# Altium PCB fullsat(1).PcbDoc
Units mm, origin at the board's own origin, x right, y up, seen from the top; angles counter-clockwise.
Board outline 82 x 325.9 mm, 4 copper layers (F.Cu, In1.Cu, In2.Cu, B.Cu); 26 components, 0 nets, 102 pads, 11 vias.
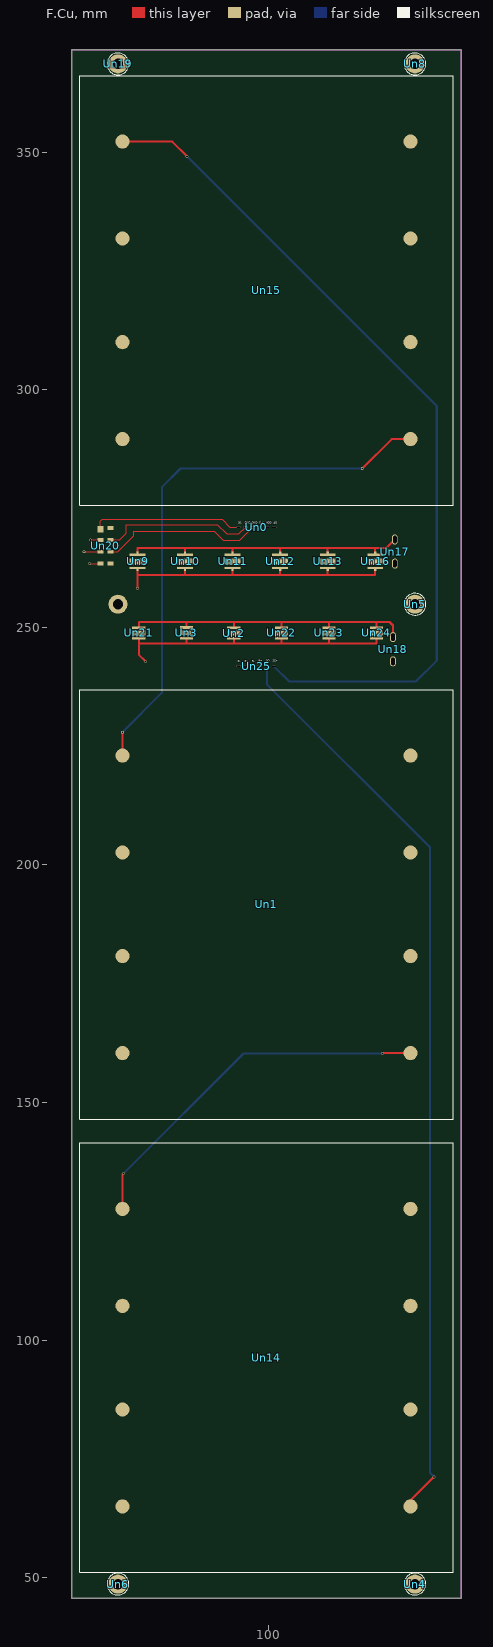
[diagram p0: F.Cu view]
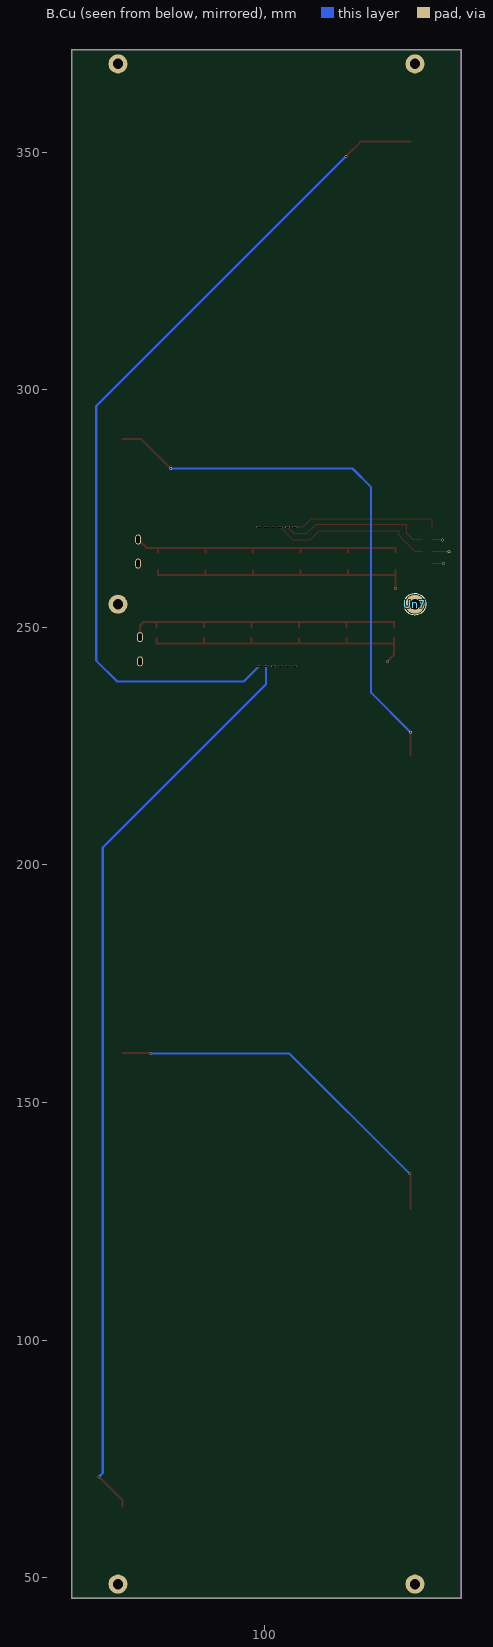
[diagram p1: B.Cu view, seen from below]
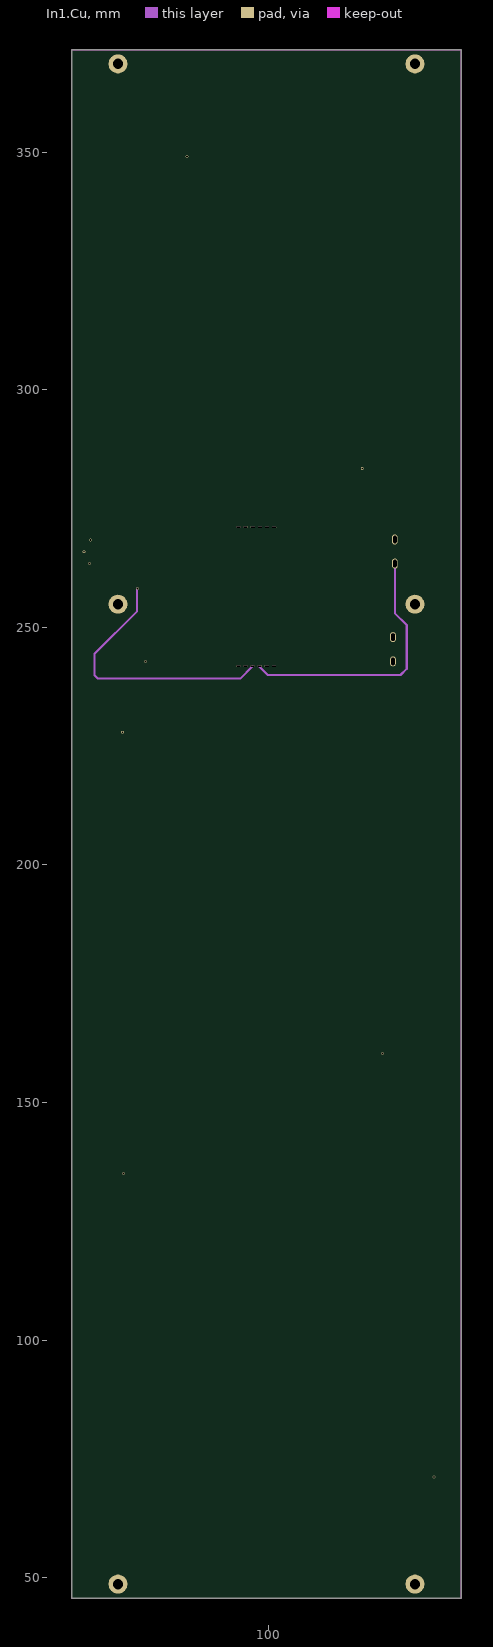
[diagram p2: In1.Cu]
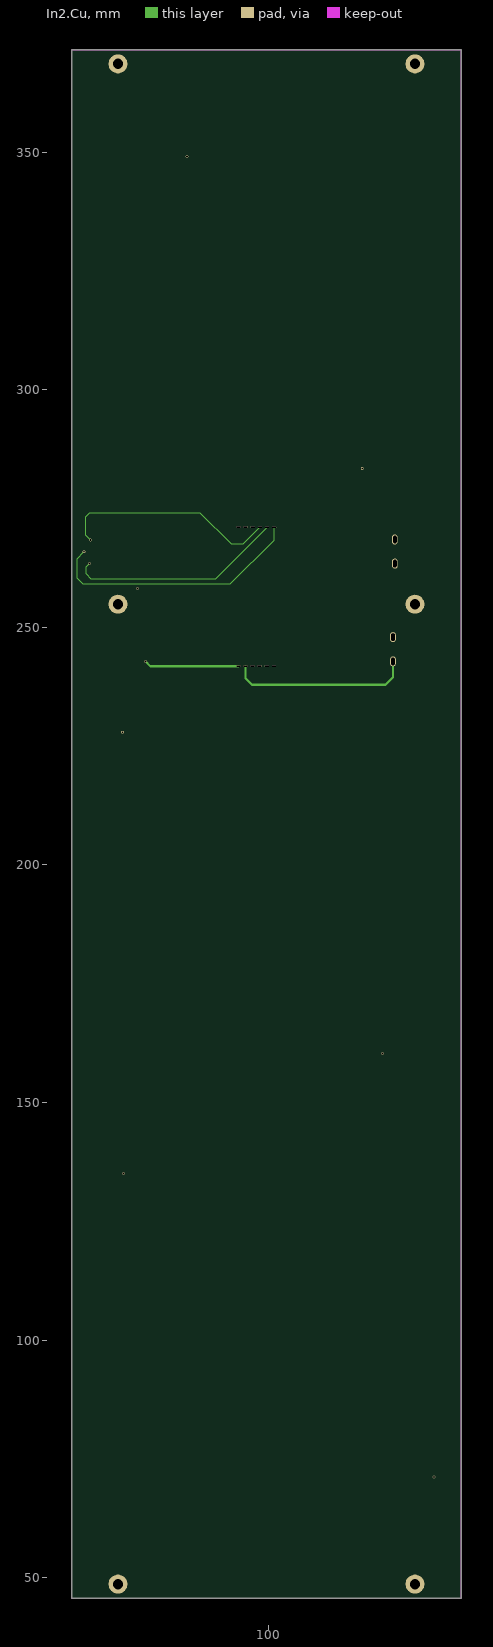
[diagram p3: In2.Cu]

## Layer stack, top to bottom
F.Mask: solder mask 0.0102, Solder Resist, Dk 3.5
F.Cu: signal copper 0.0356
Dielectric 1: dielectric 0.32, FR-4, Dk 4.8
In1.Cu: signal copper 0.0356
Dielectric2: dielectric 0.32, FR-4, Dk 4.8
In2.Cu: signal copper 0.0356
Dielectric3: dielectric 0.32, FR-4, Dk 4.8
B.Cu: signal copper 0.0356
B.Mask: solder mask 0.0102, Solder Resist, Dk 3.5

## Board outline
140.54,371.55 140.54,45.65 58.54,45.65 58.54,371.55 140.54,371.55

## Design rules (kind name [scope] priority, off if disabled: settings)
Clearance "Clearence 0.2_NetClass" [InNetClass('Default')] p1: gap=0.2 ignorepadtopadclearanceinfootprint=FALSE
HoleSize "Hole Size (Default)" [All] p1: absolutevalues=TRUE maxlimit=10 minlimit=0.3 maxpercent=80.000 minpercent=20.000
MinimumSolderMaskSliver [All] p1: minsoldermaskwidth=0
PolygonConnect [All] p1: connectstyle=Direct reliefconductorwidth=0.254 reliefentries=4 polygonreliefangle="90 Angle" airgapwidth=0.254
RoutingVias [All] p1: holewidth=0.711 width=1.27 viastyle="Through Hole" minholewidth=0.711 minwidth=1.27 maxholewidth=0.711 maxwidth=1.27
SilkToSilkClearance [All] p1: silktosilkclearance=0
SilkToSolderMaskClearance [IsPad] p1: minsilkscreentomaskgap=0 clearancetoexposedcopper=TRUE
SolderMaskExpansion [All] p1: expansion=0.102 istentingtop=FALSE
Width [All] p1: maxlimit=10 minlimit=0.2 preferedwidth=0.25 minimp=50.000000 maximp=50.000000 favimp=50.000000
26 further rules are at their usual default settings.

## Components (designator, comment, footprint, x,y, rotation, side; value= is the part's Value field where it differs from the comment)
Un0 "Comment" connector 97.42,271.05 r0 top
Un1 "Comment" solarpanels#1 64.74,160.4 r90 top
Un2 "Comment" greenLED 92.68,248.79 r90 top
Un3 "Comment" greenLED 82.7,248.82 r90 top
Un4 "Comment" 1pin 130.79,48.65 r0 top
Un5 "Comment" 1pin 130.79,254.85 r0 top
Un6 "Comment" 1pin 68.29,48.65 r0 top
Un7 "Comment" 1pin 68.29,254.85 r180 bottom
Un8 "Comment" 1pin 130.79,368.55 r0 top
Un9 "Comment" redLED 69,263.86 r90 top
Un10 "Comment" redLED 79,263.86 r90 top
Un11 "Comment" redLED 89,263.86 r90 top
Un12 "Comment" redLED 99,263.86 r90 top
Un13 "Comment" redLED 109,263.86 r90 top
Un14 "Comment" solarpanels#2 64.84,65 r90 top
Un15 "Comment" solarpanels#2 64.84,289.6 r90 top
Un16 "Comment" redLED 119,263.86 r90 top
Un17 "Comment" resistor#1 124.19,263.39 r90 top
Un18 "Comment" resistor#2 123.91,242.83 r90 top
Un19 "Comment" 1pin 68.29,368.55 r0 top
Un20 "Comment" sunsensor 63.96,271.29 r0 top
Un21 "Comment" greenLED 72.68,248.81 r90 top
Un22 "Comment" greenLED 102.7,248.8 r90 top
Un23 "Comment" greenLED 112.69,248.8 r90 top
Un24 "Comment" greenLED 122.69,248.8 r90 top
Un25 "Comment" connector 97.37,241.8 r0 top

## Footprints (in the part's own frame and the unit in brackets; to place one, negate y for a bottom-side part, rotate by r counter-clockwise, add the part's x,y. Pads: shape width x height; smd on the part's side, far side on the other; paste and mask are expansions set on the pad)
1pin [mm]
  round 4 hole 2.2 paste-2539.97 mask+0.2: 1(0,0)
  silkscreen extent -2.28,-2.29 2.29,2.29
connector [mm]
  rrect100% 0.9x0.4 hole 0.25 slot 0.75 at 0 deg paste-2539.97 mask+0.2: 1(-3.75,0) 21(-2.253,0) 31(-0.756,0) 41(0.741,0) 51(2.238,0) 61(3.735,0)
greenLED [mm]
  rect 1x2.8 smd mask+0.2: 1(0,0)
  rect 0.55x2.8 smd mask+0.2: 2(-1.125,0) 3(1.125,0)
redLED [mm]
  rect 1.3x3.3 smd mask+0.2: 1(0,-3.4)
  rect 0.5x3.3 smd mask+0.2: 2(-1.4,-3.4) 3(1.4,-3.4)
  rect 0.4x0.5 smd mask+0.2: 4(1.85,-3.4) 5(-1.85,-3.4)
resistor#1 [mm]
  rrect100% 2.1x1.2 hole 0.7 slot 1.6 at 0 deg paste-2539.97 mask+0.2: 1(0,-2.37) 1(5.08,-2.37)
resistor#2 [mm]
  rrect100% 2.1x1.2 hole 0.7 slot 1.6 at 0 deg paste-2539.97 mask+0.2: 1(0,-2.25) 1(5.08,-2.25)
solarpanels#1 [mm]
  round 3 smd mask+0.2: 1(0,-4.5) 1(0,-65.1) 1(20.4,-4.5) 1(20.4,-65.1) 1(42.2,-4.5) 1(42.2,-65.1) 1(62.6,-65.1) 1(62.6,-4.5)
solarpanels#2 [mm]
  round 3 smd mask+0.2: 1(0,-4.4) 1(0,-65) 1(20.4,-4.4) 1(20.4,-65) 1(42.2,-4.4) 1(42.2,-65) 1(62.6,-65) 1(62.6,-4.4)
sunsensor [mm]
  rect 1.3x1.4 smd mask+0.2: 1(0.65,-0.7)
  rect 1.3x0.8 smd mask+0.2: 2(0.65,-7.9) 2(0.65,-5.4) 2(0.65,-2.9) 2(2.75,-7.9) 2(2.75,-5.4) 2(2.75,-2.9) 2(2.75,-0.4)

## Part data
Un0 Un25: library part connector
Un1 Un14 Un15: library part solarpanels
Un2 Un3 Un21 Un22 Un23 Un24: library part greenLED
Un4 Un5 Un6 Un7 Un8 Un19: library part 1pin, "module 1 pin (ou trou mecanique de percage)"
Un9 Un10 Un11 Un12 Un13 Un16: library part redLED
Un17 Un18: library part resistor
Un20: library part sunsensor

## Via types
v1: diameter 0.6, hole 0.4, F.Cu to B.Cu, tented both sides, 11 vias

## Nets (pads, with @x,y where several pads share a name; then routed paths per layer and width w, separated by ;. In a path a pad name is that pad's centre, name@x,y a point inside that pad or via, vN(x,y) a via of type N, cw(c..) or ccw(c..) an arc to the next point about the centre after c; other vN are vias at no path point)
pads on no net: Un0.1 Un0.21 Un0.31 Un0.41 Un0.51 Un0.61 Un1.1 Un2.1 Un2.2 Un2.3 Un3.1 Un3.2 Un3.3 Un4.1 Un5.1 Un6.1 Un7.1 Un8.1 Un9.1 Un9.2 Un9.3 Un9.4 Un9.5 Un10.1 Un10.2 Un10.3 Un10.4 Un10.5 Un11.1 Un11.2 Un11.3 Un11.4 Un11.5 Un12.1 Un12.2 Un12.3 Un12.4 Un12.5 Un13.1 Un13.2 Un13.3 Un13.4 Un13.5 Un14.1 Un15.1 Un16.1 Un16.2 Un16.3 Un16.4 Un16.5 Un17.1 Un18.1 Un19.1 Un20.1 Un20.2 Un21.1 Un21.2 Un21.3 Un22.1 Un22.2 Un22.3 Un23.1 Un23.2 Un23.3 Un24.1 Un24.2 Un24.3 Un25.1 Un25.21 Un25.31 Un25.41 Un25.51 Un25.61
copper on no net: | length 1235.5
  F.Cu w0.25: v1(61.13,265.89) 61.12,265.89 64.61,265.89 ; v1(62.28,263.39) 64.61,263.39 ; v1(62.5,268.39) 64.61,268.39 ; 64.61,270.59 64.61,272.26 65.03,272.68 90.23,272.68 91.86,271.05 93.67,271.05 ; 66.71,265.89 68.24,265.89 71.62,269.27 71.62,270.17 71.65,270.2 88.54,270.2 90.47,268.27 93.884,268.27 96.664,271.05 ; 66.71,268.39 68.67,268.39 70.05,269.77 70.05,271.57 70.06,271.58 89.2,271.58 91.15,269.63 93.747,269.63 95.167,271.05
  F.Cu w0.45: 69.24,127.6 69.24,134.84 v1(69.42,135.02) ; 69.24,223 v1(69.24,227.91) ; 69.24,352.2 79.72,352.2 v1(82.84,349.08) ; v1(72.39,258.16) 72.4,258.17 72.4,261.01 ; 72.4,262.01 72.4,261.01 ; 72.4,265.71 72.4,266.71 82.4,266.71 ; 72.68,247.685 72.68,246.6 72.69,246.6 ; 72.68,249.935 72.68,251.1 72.72,251.1 82.7,251.1 ; v1(74.1,242.81) 72.69,244.22 72.69,246.6 ; 82.4,262.01 82.4,261.01 ; 82.4,265.71 82.4,266.71 ; 82.7,247.695 82.7,246.6 ; 82.7,249.945 82.7,251.1 ; 92.4,262.01 92.4,261.01 ; 92.4,265.71 92.4,266.71 ; 92.68,247.665 92.68,246.6 ; 92.68,249.915 92.68,251.1 ; 102.4,262.01 102.4,261.01 ; 102.4,265.71 102.4,266.71 ; 102.7,247.675 102.7,246.6 ; 102.7,249.925 102.7,251.1 ; 112.4,262.01 112.4,261.01 ; 112.4,265.71 112.4,266.71 ; 112.69,247.675 112.69,246.6 ; 112.69,249.925 112.69,251.1 ; v1(119.69,283.41) 125.88,289.6 129.84,289.6 ; 122.4,262.01 122.4,261.01 112.4,261.01 ; 122.4,265.71 122.4,266.71 ; 122.69,247.675 122.69,246.6 122.63,246.6 112.69,246.6 ; 122.69,249.925 122.69,251.1 122.68,251.1 ; v1(123.93,160.32) 124.01,160.4 129.84,160.4 ; 126.16,247.91 126.16,250.38 125.44,251.1 122.68,251.1 ; 126.56,268.47 124.8,266.71 122.4,266.71 ; 129.84,65 129.84,66.26 v1(134.8,71.22) ; 72.4,261.01 82.4,261.01 ; 72.69,246.6 78.98,246.6 82.7,246.6 ; 82.4,261.01 92.4,261.01 ; 82.4,266.71 92.4,266.71 ; 82.7,246.6 92.68,246.6 ; 82.7,251.1 92.68,251.1 ; 92.4,261.01 102.4,261.01 ; 92.4,266.71 102.4,266.71 ; 92.68,246.6 102.7,246.6 ; 92.68,251.1 102.7,251.1 ; 102.4,261.01 112.4,261.01 ; 102.4,266.71 112.4,266.71 ; 102.7,246.6 112.69,246.6 ; 102.7,251.1 112.69,251.1 ; 112.4,266.71 122.4,266.71 ; 112.69,251.1 122.68,251.1
  In1.Cu w0.45: v1(72.39,258.16) 72.33,258.1 72.33,253.39 63.36,244.42 63.36,239.9 64.08,239.18 93.994,239.18 96.614,241.8 ; 98.04,241.75 98.58,241.21 ; 98.111,241.679 98.58,241.21 ; 126.56,263.39 126.56,252.98 129.07,250.47 129.07,241.27 127.75,239.95 99.84,239.95 98.58,241.21
  In2.Cu w0.25: v1(61.13,265.89) 59.69,264.45 59.69,260.32 60.89,259.12 91.93,259.12 101.155,268.345 101.155,271.05 ; v1(62.28,263.39) 61.61,262.72 61.61,261.25 62.61,260.25 88.858,260.25 99.658,271.05 ; v1(62.5,268.39) 61.56,269.33 61.56,273.29 62.36,274.09 85.53,274.09 92.09,267.53 94.641,267.53 98.161,271.05
  In2.Cu w0.45: v1(74.1,242.81) 75.11,241.8 93.62,241.8 ; 95.117,241.8 95.117,239.283 96.5,237.9 124.59,237.9 126.16,239.47 126.16,242.83
  B.Cu w0.45: v1(69.24,227.91) 77.52,236.19 77.52,279.48 81.45,283.41 v1(119.69,283.41) ; v1(69.42,135.02) 94.72,160.32 v1(123.93,160.32) ; v1(82.84,349.08) 135.37,296.55 135.37,242.98 131.01,238.62 104.285,238.62 101.105,241.8 ; 99.608,241.8 99.63,241.778 99.63,240.94 99.63,238 133.98,203.65 133.98,72.04 v1(134.8,71.22)

## Keep-outs
Edge.Cuts:
  lines w0.15: 58.54,45.65 58.54,371.55 ; 58.54,45.65 140.54,45.65 ; 58.54,45.65 58.54,371.55 ; 58.54,45.65 140.54,45.65 ; 58.54,371.55 140.54,371.55 ; 58.54,371.55 140.54,371.55 ; 140.54,45.65 140.54,371.55 ; 140.54,45.65 140.54,371.55

## Silkscreen, mask and mechanical layers (free items; w line width, h text height)
F.SilkS:
  lines w0.2: 60.24,275.8 60.24,366.1 138.84,366.1 ; 60.24,275.95 60.24,275.925 60.24,275.7 138.84,275.7 138.84,275.8 138.84,366.1 ; 60.265,141.5 60.24,141.5 ; 60.265,236.9 60.24,236.9 ; 138.84,366.075 138.84,366.1 ; 60.24,141.5 138.84,141.5 138.84,51.1 60.24,51.1 60.24,141.5 ; 60.24,236.9 138.84,236.9 138.84,146.5 60.24,146.5 60.24,236.9
  text "AO" at 101.028,271.717 h0.4
  text "GND" at 96.446,271.697 h0.4
  text "CLK" at 98.019,271.707 h0.4
  text "VDD" at 99.457,271.708 h0.4
  text "SI1" at 93.558,271.687 h0.4
  text "GND" at 94.976,271.687 h0.4
  text "R+" at 97.965,242.59 h0.4
  text "SC-" at 99.469,242.597 h0.4
  text "SC+" at 100.879,242.597 h0.4
  text "G-" at 93.532,242.567 h0.4
  text "R-" at 96.555,242.57 h0.4
  text "G+" at 94.983,242.557 h0.4